# Altium PCB 上.PCBDOC
Units mil, origin at the board's own origin, x right, y up, seen from the top; angles counter-clockwise.
Board outline 6338.58 x 3385.83 mil, 2 copper layers (Top Layer, Bottom Layer); 4 components, 41 nets, 122 pads, 0 vias.
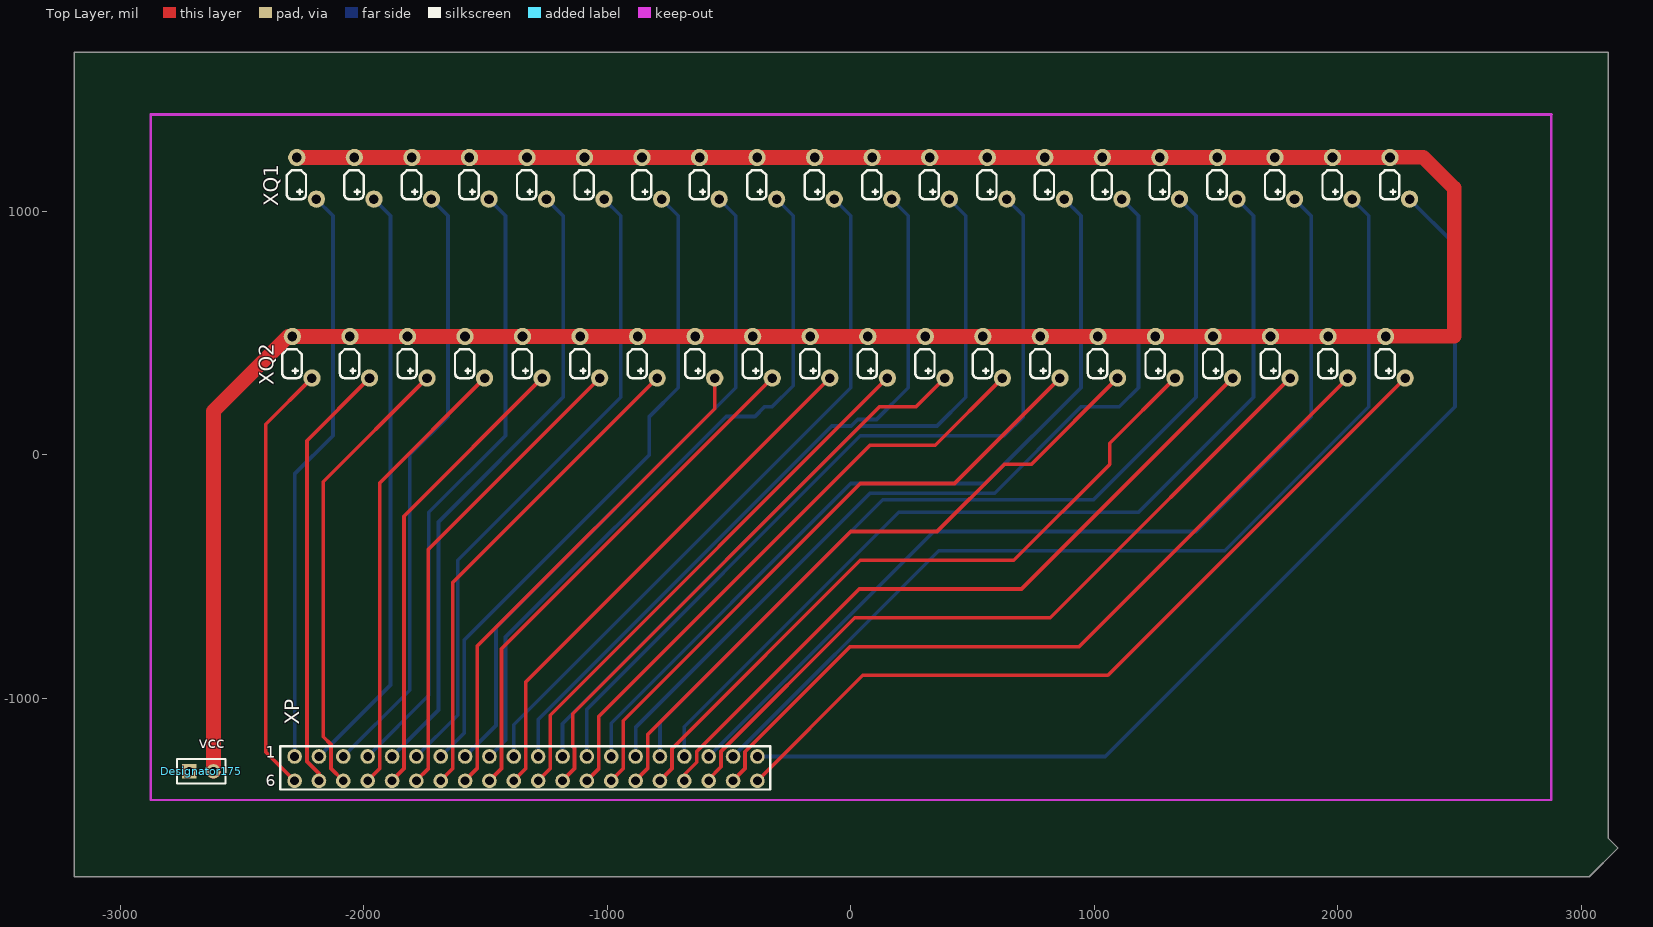
[diagram p0: Top Layer view]
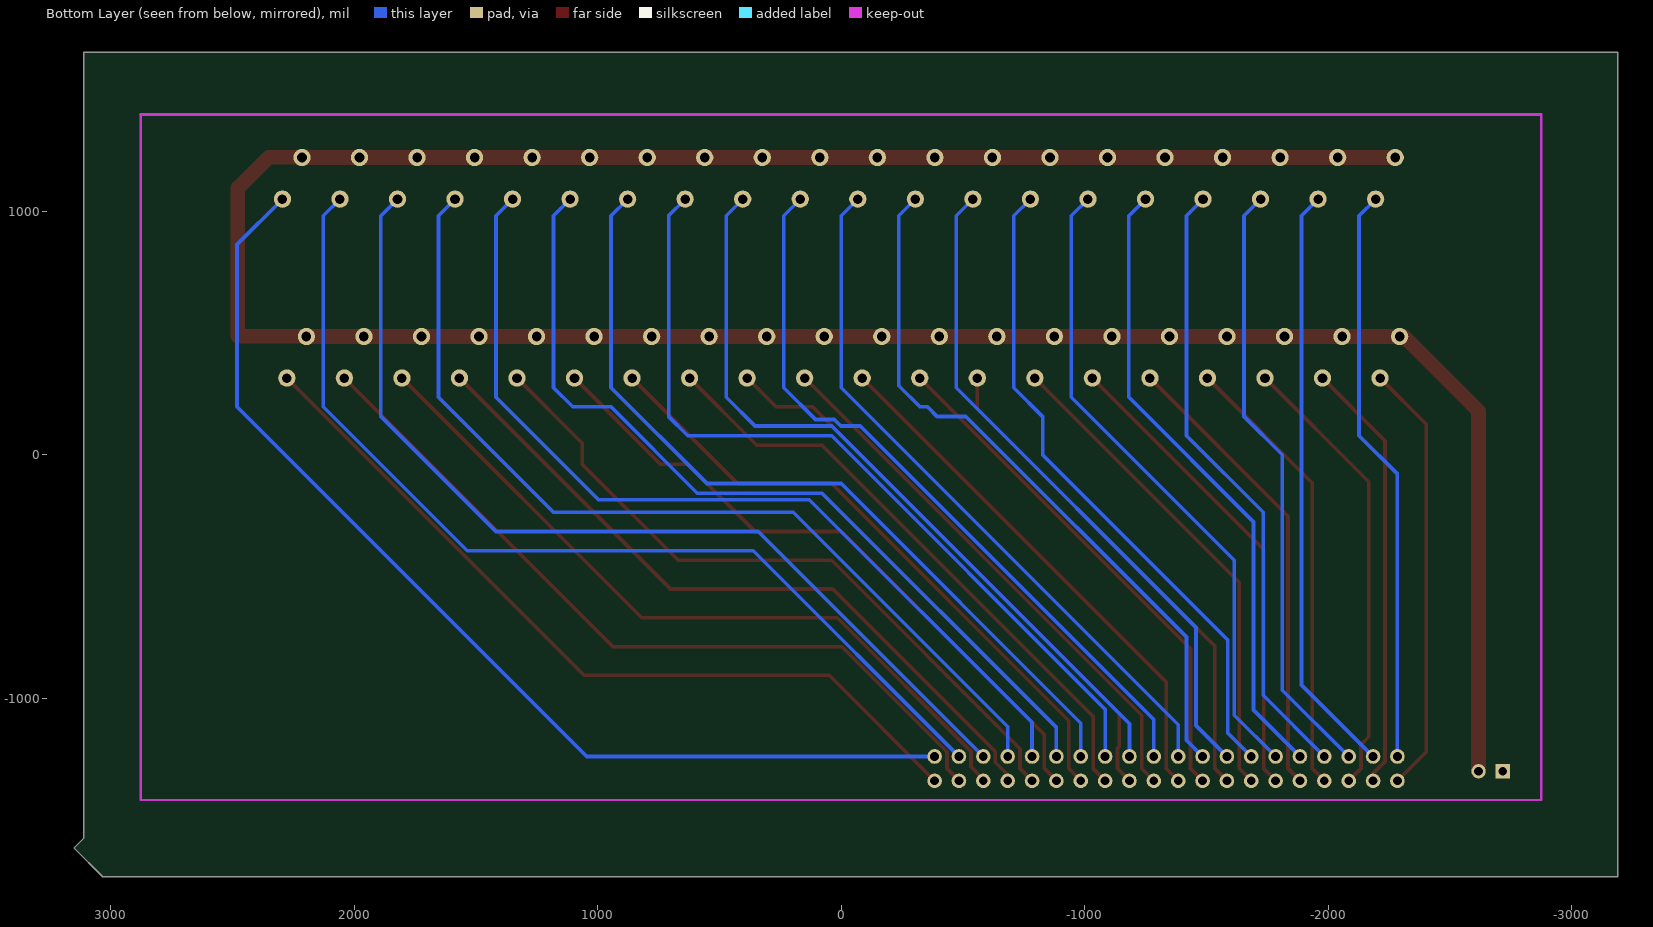
[diagram p1: Bottom Layer view, seen from below]

## Layer stack, top to bottom
Top Layer: signal copper 1.4
Dielectric: dielectric 12.6, FR-4, Dk 4.8
Bottom Layer: signal copper 1.4

## Board outline
-3188.98,1653.54 -3188.98,-1732.28 3031.5,-1732.28 3149.61,-1614.17 3110.24,-1574.8 3110.24,1653.54 -3149.61,1653.54

## Design rules (kind name [scope] priority, off if disabled: settings)
Clearance [All] p1: gap=11.81
FabricationTestPointUsage TestPointUsage [All] p1: valid=0 allowmultiple=FALSE
FabricationTestpoint Testpoint [All] p1: side=3 testpointundercomponent=TRUE minsize=40 maxsize=100 preferedsize=60 minholesize=0 maxholesize=40 preferedholesize=32 testpointgrid=1 allowsidetop=TRUE allowsidebottom=TRUE usegrid=TRUE gridtolerance=0.01
PolygonConnect [All] p1: connectstyle=Relief reliefconductorwidth=10 reliefentries=4 polygonreliefangle="90 Angle" airgapwidth=10
RoutingLayers [All] p1: top layer_v5=FALSE bottom layer_v5=TRUE
RoutingVias [All] p1: holewidth=31.5 width=62.99 viastyle="Through Hole" minholewidth=28 minwidth=50 maxholewidth=28 maxwidth=50
SilkToSolderMaskClearance SilkscreenOverComponentPads [IsPad] p1: minsilkscreentomaskgap=10 clearancetoexposedcopper=TRUE
SolderMaskExpansion [All] p1: expansion=4
Width [All] p1: maxlimit=100 minlimit=10 preferedwidth=15
24 further rules are at their usual default settings.

## Classes and differential pairs
component class 盲文原理图1: XP XQ1 XQ2

## Components (designator, comment, footprint, x,y, rotation, side; value= is the part's Value field where it differs from the comment)
Designator175 "" HDR1X2 -2716.54,-1299.21 r0 top
XP "Header 21X2" XinPian -2283.46,-1338.58 r180 top
XQ1 "Header 20X2" XIANQUAN1 2294.12,1049.61 r180 top
XQ2 "Header 20X2" XIANQUAN1 2275.95,314.96 r180 top

## Footprints (in the part's own frame and the unit in brackets; to place one, negate y for a bottom-side part, rotate by r counter-clockwise, add the part's x,y. Pads: shape width x height; smd on the part's side, far side on the other; paste and mask are expansions set on the pad)
HDR1X2 [mm] "Connector; Header; 2 Position"
  rect 1.5x1.5 hole 0.9: 1(0,0)
  round 1.5 hole 0.9: 2(2.54,0)
  silkscreen extent -1.27,-1.27 3.81,1.27
XIANQUAN1 [mm]
  round 1.8 hole 1: 1(2.04,-4.34) 2(0,0) 3(8.04,-4.34) 4(6,0) 5(14.04,-4.34) 6(12,0) 7(20.04,-4.34) 8(18,0) 9(26.04,-4.34) 10(24,0) 11(32.04,-4.34) 12(30,0) 13(38.04,-4.34) 14(36,0) 15(44.04,-4.34) 16(42,0) 17(50.04,-4.34) 18(48,0) 19(56.04,-4.34) 20(54,0) 21(62.04,-4.34) 22(60,0) 23(68.04,-4.34) 24(66,0) 25(74.04,-4.34) 26(72,0) 27(80.04,-4.34) 28(78,0) 29(86.04,-4.34) 30(84,0) 31(92.04,-4.34) 32(90,0) 33(98.04,-4.34) 34(96,0) 35(104.04,-4.34) 36(102,0) 37(110.04,-4.34) 38(108,0) 39(116.04,-4.34) 40(114,0)
  silkscreen extent 1.08,-3 117.08,0
XinPian [mil]
  round 60 hole 36: 1(0,-100) 2(-100,-100) 3(-200,-100) 4(-300,-100) 5(-400,-100) 6(-500,-100) 7(-600,-100) 8(-700,-100) 9(-800,-100) 10(-900,-100) 11(-1000,-100) 12(-1100,-100) 13(-1200,-100) 14(-1300,-100) 15(-1400,-100) 16(-1500,-100) 17(-1600,-100) 18(-1700,-100) 19(-1800,-100) 20(-1900,-100) 21(-1900,0) 22(-1800,0) 23(-1700,0) 24(-1600,0) 25(-1500,0) 26(-1400,0) 27(-1300,0) 28(-1200,0) 29(-1100,0) 30(-1000,0) 31(-900,0) 32(-800,0) 33(-700,0) 34(-600,0) 35(-500,0) 36(-400,0) 37(-300,0) 38(-200,0) 39(-100,0) 40(0,0)
  silkscreen extent -1953,-142 59,35

## Part data
XP: library part "Header 22X2", "Header, 22-Pin, Dual row"
XQ1 XQ2: "Header, 20-Pin, Dual row"

## Nets (pads, with @x,y where several pads share a name; then routed paths per layer and width w, separated by ;. In a path a pad name is that pad's centre, name@x,y a point inside that pad or via, vN(x,y) a via of type N, cw(c..) or ccw(c..) an arc to the next point about the centre after c; other vN are vias at no path point)
GND: Designator175.2 XQ1.1 XQ1.3 XQ1.5 XQ1.7 XQ1.9 XQ1.11 XQ1.13 XQ1.15 XQ1.17 XQ1.19 XQ1.21 XQ1.23 XQ1.25 XQ1.27 XQ1.29 XQ1.31 XQ1.33 XQ1.35 XQ1.37 XQ1.39 XQ2.1 XQ2.3 XQ2.5 XQ2.7 XQ2.9 XQ2.11 XQ2.13 XQ2.15 XQ2.17 XQ2.19 XQ2.21 XQ2.23 XQ2.25 XQ2.27 XQ2.29 XQ2.31 XQ2.33 XQ2.35 XQ2.37 XQ2.39 | length 12108.9
  Top Layer w15: 2475.98,485.83 2477.17,487.01
  Top Layer w60: Designator175.2 -2616.54,178.74 -2309.45,485.83 XQ2.39 XQ2.37 XQ2.35 XQ2.33 XQ2.31 XQ2.29 XQ2.27 XQ2.25 XQ2.23 XQ2.21 XQ2.19 XQ2.17 XQ2.15 XQ2.13 XQ2.11 XQ2.9 XQ2.7 XQ2.5 XQ2.3 XQ2.1 2196.82,487.01 2477.17,487.01 ; XQ1.39 XQ1.1 2214.98,1221.65 2350.79,1221.65 2477.17,1095.27 2477.17,491.73
XQ1_1: XP.20 XQ1.2 | length 4388.2
  Bottom Layer w15: XP.20 1044.88,-1238.58 2480.31,196.85 2480.31,863.41 XQ1.2
XQ1_2: XP.19 XQ1.4 | length 4085
  Bottom Layer w15: XP.19 361.42,-393.7 1535.43,-393.7 2125.98,196.85 2125.98,981.52 XQ1.4
XQ1_3: XP.18 XQ1.6 | length 3971.8
  Bottom Layer w15: XP.18 340.16,-314.96 1417.32,-314.96 1889.76,157.48 1889.76,981.52 XQ1.6
XQ1_4: XP.17 XQ1.8 | length 3861
  Bottom Layer w15: XP.17 -683.46,-1116.54 196.85,-236.22 1181.1,-236.22 1653.54,236.22 1653.54,981.52 XQ1.8
XQ1_5: XP.16 XQ1.10 | length 3735.4
  Bottom Layer w15: XP.16 -783.46,-1098.43 130.67,-184.29 996.81,-184.29 1417.32,236.22 1417.32,981.52 XQ1.10
XQ1_6: XP.15 XQ1.12 | length 3563.6
  Bottom Layer w15: XP.15 -883.46,-1119.68 78.74,-157.48 590.55,-157.48 944.88,196.85 1102.36,196.85 1181.1,275.59 1181.1,981.52 XQ1.12
XQ1_7: XP.14 XQ1.14 | length 3438
  Bottom Layer w15: XP.14 -983.46,-1101.57 0,-118.11 551.18,-118.11 944.88,275.59 944.88,981.52 XQ1.14
XQ1_8: XP.13 XQ1.16 | length 3404.7
  Bottom Layer w15: XP.13 -1083.46,-1044.09 39.37,78.74 629.92,78.74 708.66,157.48 708.66,981.52 XQ1.16
XQ1_9: XP.12 XQ1.18 | length 3187.6
  Bottom Layer w15: XP.12 -1183.46,-1104.72 39.37,118.11 354.33,118.11 472.44,236.22 472.44,981.52 XQ1.18 XQ1.18@403.54,1049.61
XQ1_10: XP.11 XQ1.20 | length 3038.1
  Bottom Layer w15: XP.11 -1283.46,-1086.61 -78.74,118.11 1.45,118.11 28.26,144.92 105.55,144.92 236.22,275.59 236.22,981.52 XQ1.20
XQ1_11: XP.10 XQ1.22 | length 2889.4
  Bottom Layer w15: XP.10 -1383.46,-1107.87 0,275.59 0,981.52 XQ1.22
XQ1_12: XP.9 XQ1.24 | length 2920.5
  Bottom Layer w15: XP.9 -1417.32,-1172.44 -1417.32,-748.03 -511.81,157.48 -393.7,157.48 -354.33,196.85 -323.15,196.85 -236.22,283.78 -236.22,981.52 XQ1.24
XQ1_13: XP.8 XQ1.26 | length 2776.6
  Bottom Layer w15: XP.8 -1456.69,-1111.81 -1456.69,-708.66 -472.44,275.59 -472.44,981.52 XQ1.26
XQ1_14: XP.7 XQ1.28 | length 2720.2
  Bottom Layer w15: XP.7 -1587.36,-1142.48 -1587.36,-760.59 -826.77,0 -826.77,157.48 -708.66,275.59 -708.66,981.52 XQ1.28
XQ1_15: XP.6 XQ1.30 | length 2663.7
  Bottom Layer w15: XP.6 -1614.17,-1069.29 -1614.17,-433.07 -944.88,236.22 -944.88,981.52 XQ1.30
XQ1_16: XP.5 XQ1.32 | length 2607.3
  Bottom Layer w15: XP.5 -1692.91,-1048.03 -1692.91,-275.59 -1181.1,236.22 -1181.1,981.52 XQ1.32
XQ1_17: XP.4 XQ1.34 | length 2550.9
  Bottom Layer w15: XP.4 -1732.28,-987.4 -1732.28,-236.22 -1417.32,78.74 -1417.32,981.52 XQ1.34
XQ1_18: XP.3 XQ1.36 | length 2494.5
  Bottom Layer w15: XP.3 -1811.02,-966.14 -1811.02,0 -1653.54,157.48 -1653.54,981.52 XQ1.36
XQ1_19: XP.2 XQ1.38 | length 2438
  Bottom Layer w15: XP.2 -1889.76,-944.88 -1889.76,981.52 XQ1.38
XQ1_20: XP.1 XQ1.40 | length 2381.6
  Bottom Layer w15: XP.1 -2283.46,-78.74 -2125.98,78.74 -2125.98,981.52 XQ1.40
XQ2_1: XP.21 XQ2.2 | length 3344.3
  Top Layer w15: XP.21 49.61,-905.51 1055.48,-905.51 XQ2.2
XQ2_2: XP.22 XQ2.4 | length 3249
  Top Layer w15: XP.22 -483.46,-1337.2 -434.15,-1287.89 -434.15,-1219.54 -2.02,-787.4 937.37,-787.4 XQ2.4
XQ2_3: XP.23 XQ2.6 | length 3112.7
  Top Layer w15: XP.23 -583.46,-1331.5 -532.78,-1280.81 -532.78,-1218.16 16.09,-669.29 819.26,-669.29 XQ2.6
XQ2_4: XP.24 XQ2.8 | length 2976.5
  Top Layer w15: XP.24 -683.46,-1313.39 -632.78,-1262.7 -632.78,-1218.16 34.2,-551.18 701.15,-551.18 XQ2.8
XQ2_5: XP.25 XQ2.10 | length 2898.4
  Top Layer w15: XP.25 -783.46,-1337.2 -734.15,-1287.89 -734.15,-1206.59 39.37,-433.07 669.29,-433.07 1062.99,-39.37 1062.99,46.88 XQ2.10
XQ2_6: XP.26 XQ2.12 | length 2745.3
  Top Layer w15: XP.26 -883.46,-1337.2 -834.15,-1287.89 -834.15,-1149.11 0,-314.96 354.33,-314.96 629.92,-39.37 740.52,-39.37 XQ2.12
XQ2_7: XP.27 XQ2.14 | length 2642.8
  Top Layer w15: XP.27 -983.46,-1337.2 -934.15,-1287.89 -934.15,-1091.63 39.37,-118.11 425.56,-118.11 XQ2.14
XQ2_8: XP.28 XQ2.16 | length 2517.2
  Top Layer w15: XP.28 -1083.46,-1337.2 -1034.15,-1287.89 -1034.15,-1073.52 78.74,39.37 346.82,39.37 XQ2.16
XQ2_9: XP.29 XQ2.18 | length 2397.8
  Top Layer w15: XP.29 -1183.46,-1337.2 -1134.15,-1287.89 -1134.15,-1205.38 -1141.73,-1197.8 -1141.73,-1062.99 118.11,196.85 268.08,196.85 XQ2.18
XQ2_10: XP.30 XQ2.20 | length 2247.3
  Top Layer w15: XP.30 -1283.46,-1337.2 -1234.15,-1287.89 -1234.15,-1069.16 XQ2.20
XQ2_11: XP.31 XQ2.22 | length 2190.9
  Top Layer w15: XP.31 -1383.46,-1337.2 -1334.15,-1287.89 -1334.15,-932.94 XQ2.22
XQ2_12: XP.32 XQ2.24 | length 2134.4
  Top Layer w15: XP.32 -1483.46,-1337.2 -1434.15,-1287.89 -1434.15,-796.72 XQ2.24
XQ2_13: XP.33 XQ2.26 | length 2078
  Top Layer w15: XP.33 -1583.46,-1337.2 -1534.15,-1287.89 -1534.15,-786.12 -558.69,189.34 XQ2.26
XQ2_14: XP.34 XQ2.28 | length 2021.6
  Top Layer w15: XP.34 -1683.46,-1337.2 -1634.15,-1287.89 -1634.15,-524.28 XQ2.28
XQ2_15: XP.35 XQ2.30 | length 1965.2
  Top Layer w15: XP.35 -1783.46,-1337.2 -1734.15,-1287.89 -1734.15,-388.06 XQ2.30
XQ2_16: XP.36 XQ2.32 | length 1908.7
  Top Layer w15: XP.36 -1883.46,-1337.2 -1834.15,-1287.89 -1834.15,-251.84 XQ2.32
XQ2_17: XP.37 XQ2.34 | length 1852.3
  Top Layer w15: XP.37 -1983.46,-1337.2 -1934.15,-1287.89 -1934.15,-115.62 XQ2.34
XQ2_18: XP.38 XQ2.36 | length 1865.1
  Top Layer w15: XP.38 -2134.15,-1287.89 -2134.15,-1189.27 -2165.35,-1158.07 -2165.35,-110.6 XQ2.36 ; XQ2.36@-1723.86,314.96 XQ2.36@-1722.47,314.96
XQ2_19: XP.39 XQ2.38 | length 1780.3
  Top Layer w15: XP.39 -2183.46,-1308.32 -2232.78,-1259.01 -2232.78,58.2 XQ2.38
XQ2_20: XP.40 XQ2.40 | length 1780.9
  Top Layer w15: XP.40 -2401.57,-1220.47 -2401.57,125.62 XQ2.40
pads on no net: Designator175.1

## Keep-outs
Keep-Out Layer:
  lines w10: -2874.02,1397.64 -2874.02,-1417.32 2874.83,-1417.32 2874.83,1397.64
  lines w11.81: -2874.02,1397.64 2876.38,1397.64

## Silkscreen, mask and mechanical layers (free items; w line width, h text height)
Top Overlay:
  text "vcc" at -2677.17,-1220.47 h79.37
  text "1" at -2401.57,-1259.84 h79.37
  text "6" at -2401.57,-1377.95 h79.37
Mechanical 1:
  circle w10: c-2293.31,865.75 r19.68
  circle w10: c-2194.88,865.75 r19.68
  circle w10: c-2293.31,767.32 r19.68
  circle w10: c-68.9,767.32 r19.68
  circle w10: c-68.9,865.75 r19.68
  circle w10: c-68.9,668.9 r19.68
  circle w10: c-167.32,767.32 r19.68
  circle w10: c-167.32,865.75 r19.68
  circle w10: c-167.32,668.9 r19.68
  circle w10: c68.9,668.9 r19.68
  circle w10: c68.9,865.75 r19.68
  circle w10: c68.9,767.32 r19.68
  circle w10: c167.32,668.9 r19.68
  circle w10: c167.32,865.75 r19.68
  circle w10: c167.32,767.32 r19.68
  circle w10: c305.12,668.9 r19.68
  circle w10: c305.12,865.75 r19.68
  circle w10: c305.12,767.32 r19.68
  circle w10: c403.54,668.9 r19.68
  circle w10: c403.54,865.75 r19.68
  circle w10: c403.54,767.32 r19.68
  circle w10: c541.34,668.9 r19.68
  circle w10: c541.34,865.75 r19.68
  circle w10: c541.34,767.32 r19.68
  circle w10: c639.76,668.9 r19.68
  circle w10: c639.76,865.75 r19.68
  circle w10: c639.76,767.32 r19.68
  circle w10: c777.56,668.9 r19.68
  circle w10: c777.56,865.75 r19.68
  circle w10: c777.56,767.32 r19.68
  circle w10: c875.98,668.9 r19.68
  circle w10: c875.98,865.75 r19.68
  circle w10: c875.98,767.32 r19.68
  circle w10: c1013.78,668.9 r19.68
  circle w10: c1013.78,865.75 r19.68
  circle w10: c1013.78,767.32 r19.68
  circle w10: c1112.2,668.9 r19.68
  circle w10: c1112.2,865.75 r19.68
  circle w10: c1112.2,767.32 r19.68
  circle w10: c1250,668.9 r19.68
  circle w10: c1250,865.75 r19.68
  circle w10: c1250,767.32 r19.68
  circle w10: c1348.43,668.9 r19.68
  circle w10: c1348.43,865.75 r19.68
  circle w10: c1348.43,767.32 r19.68
  circle w10: c1486.22,668.9 r19.68
  circle w10: c1486.22,865.75 r19.68
  circle w10: c1486.22,767.32 r19.68
  circle w10: c1584.65,668.9 r19.68
  circle w10: c1584.65,865.75 r19.68
  circle w10: c1584.65,767.32 r19.68
  circle w10: c1722.44,668.9 r19.68
  circle w10: c1722.44,865.75 r19.68
  circle w10: c1722.44,767.32 r19.68
  circle w10: c1820.87,668.9 r19.68
  circle w10: c1820.87,865.75 r19.68
  circle w10: c1820.87,767.32 r19.68
  circle w10: c1958.66,668.9 r19.68
  circle w10: c1958.66,865.75 r19.68
  circle w10: c1958.66,767.32 r19.68
  circle w10: c2057.09,668.9 r19.68
  circle w10: c2057.09,865.75 r19.68
  circle w10: c2057.09,767.32 r19.68
  circle w10: c2194.88,668.9 r19.68
  circle w10: c2194.88,865.75 r19.68
  circle w10: c2194.88,767.32 r19.68
  circle w10: c2293.31,668.9 r19.68
  circle w10: c2293.31,865.75 r19.68
  circle w10: c2293.31,767.32 r19.68
  circle w10: c-403.54,668.9 r19.68
  circle w10: c-403.54,865.75 r19.68
  circle w10: c-403.54,767.32 r19.68
  circle w10: c-305.12,668.9 r19.68
  circle w10: c-305.12,865.75 r19.68
  circle w10: c-305.12,767.32 r19.68
  circle w10: c-639.76,668.9 r19.68
  circle w10: c-639.76,865.75 r19.68
  circle w10: c-639.76,767.32 r19.68
  circle w10: c-541.34,668.9 r19.68
  circle w10: c-541.34,865.75 r19.68
  circle w10: c-541.34,767.32 r19.68
  circle w10: c-875.98,668.9 r19.68
  circle w10: c-875.98,865.75 r19.68
  circle w10: c-875.98,767.32 r19.68
  circle w10: c-777.56,668.9 r19.68
  circle w10: c-777.56,865.75 r19.68
  circle w10: c-777.56,767.32 r19.68
  circle w10: c-1112.2,668.9 r19.68
  circle w10: c-1112.2,865.75 r19.68
  circle w10: c-1112.2,767.32 r19.68
  circle w10: c-1013.78,668.9 r19.68
  circle w10: c-1013.78,865.75 r19.68
  circle w10: c-1013.78,767.32 r19.68
  circle w10: c-1348.43,668.9 r19.68
  circle w10: c-1348.43,865.75 r19.68
  circle w10: c-1348.43,767.32 r19.68
  circle w10: c-1250,668.9 r19.68
  circle w10: c-1250,865.75 r19.68
  circle w10: c-1250,767.32 r19.68
  circle w10: c-1584.65,668.9 r19.68
  circle w10: c-1584.65,865.75 r19.68
  circle w10: c-1584.65,767.32 r19.68
  circle w10: c-1486.22,668.9 r19.68
  circle w10: c-1486.22,865.75 r19.68
  circle w10: c-1486.22,767.32 r19.68
  circle w10: c-1820.87,668.9 r19.68
  circle w10: c-1820.87,865.75 r19.68
  circle w10: c-1820.87,767.32 r19.68
  circle w10: c-1722.44,668.9 r19.68
  circle w10: c-1722.44,865.75 r19.68
  circle w10: c-1722.44,767.32 r19.68
  circle w10: c-2057.09,668.9 r19.68
  circle w10: c-2057.09,865.75 r19.68
  circle w10: c-2057.09,767.32 r19.68
  circle w10: c-1958.66,668.9 r19.68
  circle w10: c-1958.66,865.75 r19.68
  circle w10: c-1958.66,767.32 r19.68
  circle w10: c-2293.31,668.9 r19.68
  circle w10: c-2194.88,668.9 r19.68
  circle w10: c-2194.88,767.32 r19.68
  circle w10: c-2657.48,984.25 r59.06
  circle w10: c-2657.48,767.72 r59.06
  circle w10: c-2657.48,551.18 r59.06
  circle w10: c2657.48,551.18 r59.06
  circle w10: c2657.48,767.72 r59.06
  circle w10: c2657.48,984.25 r59.06
  circle w10: c-944.88,0 r59.06
  circle w10: c944.88,0 r59.06